# Altium PCB ZX_UNO_Aplus2.PcbDoc
Units mil, origin at the board's own origin, x right, y up, seen from the top; angles counter-clockwise.
Board outline 3395.53 x 2214.53 mil, 2 copper layers (Top Layer, Bottom Layer); 91 components, 129 nets, 509 pads, 138 vias.
Unrouted connection lines stored in the file: 3.
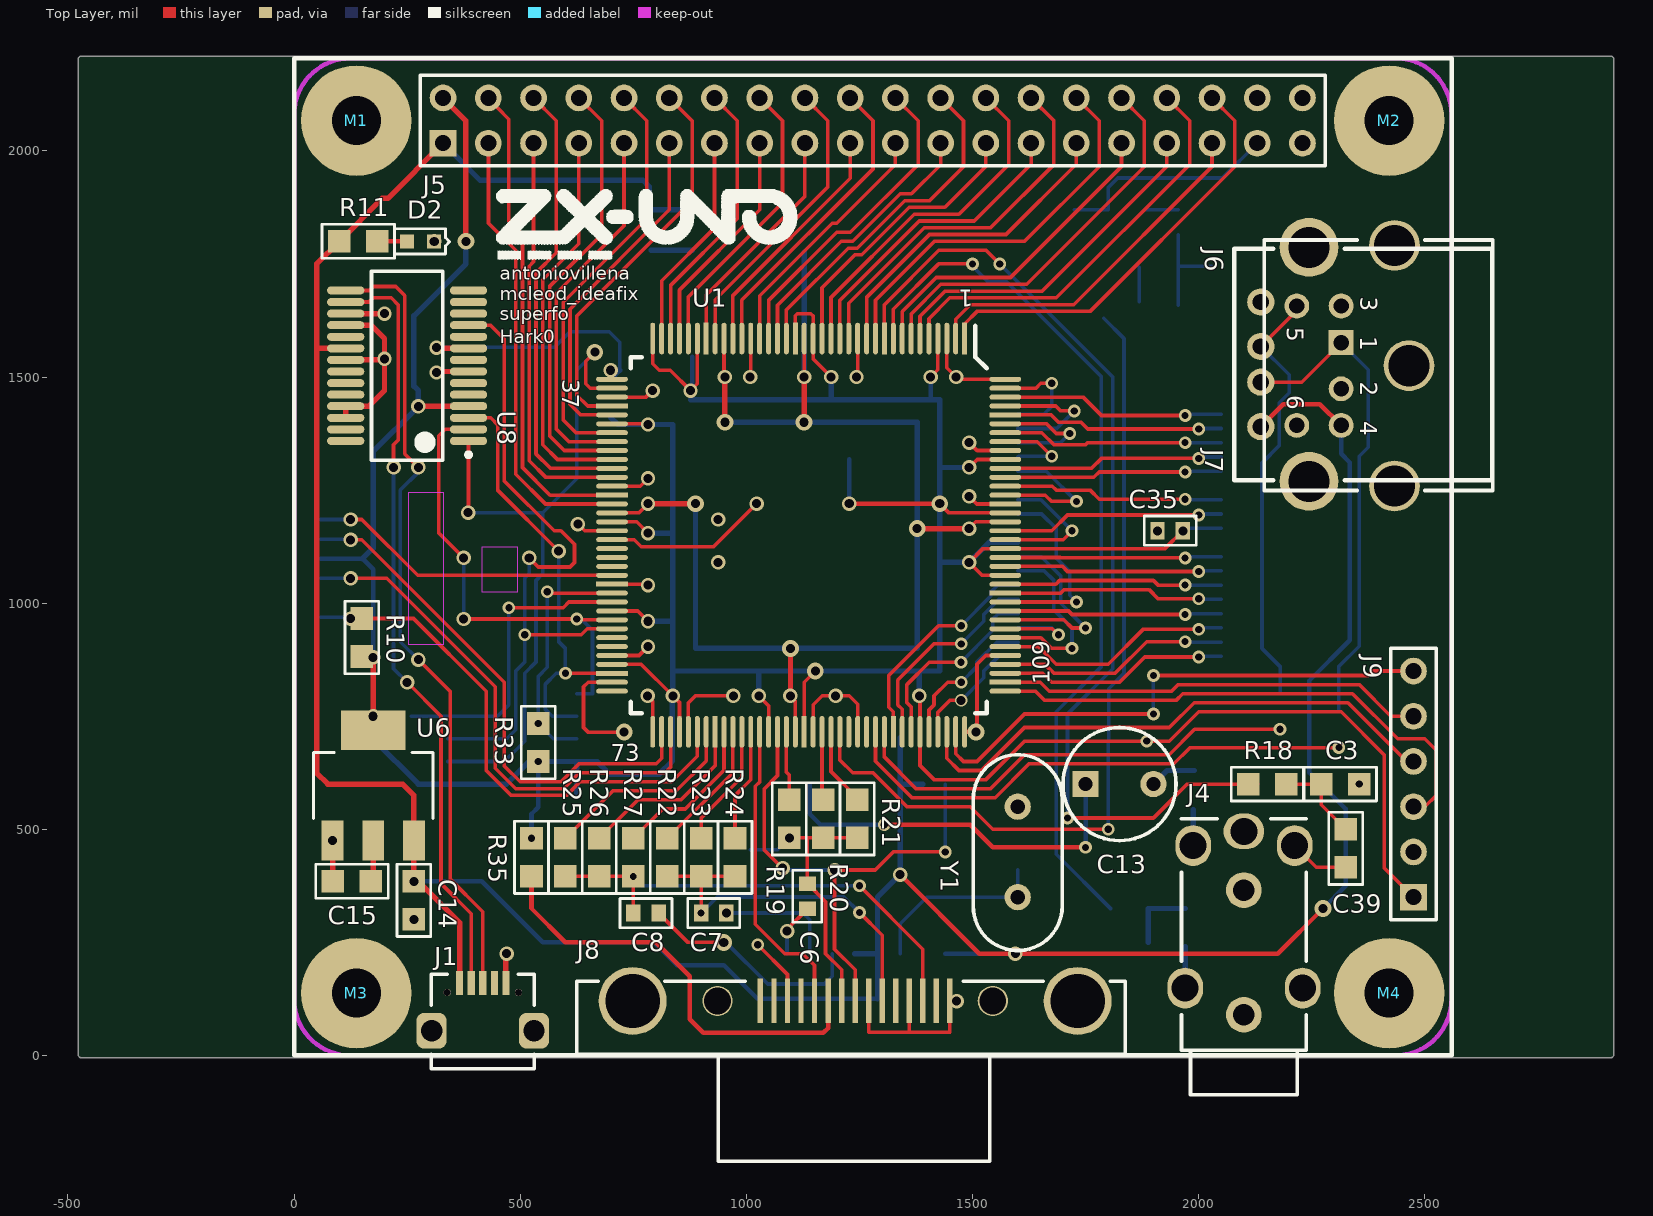
[diagram p0: Top Layer view]
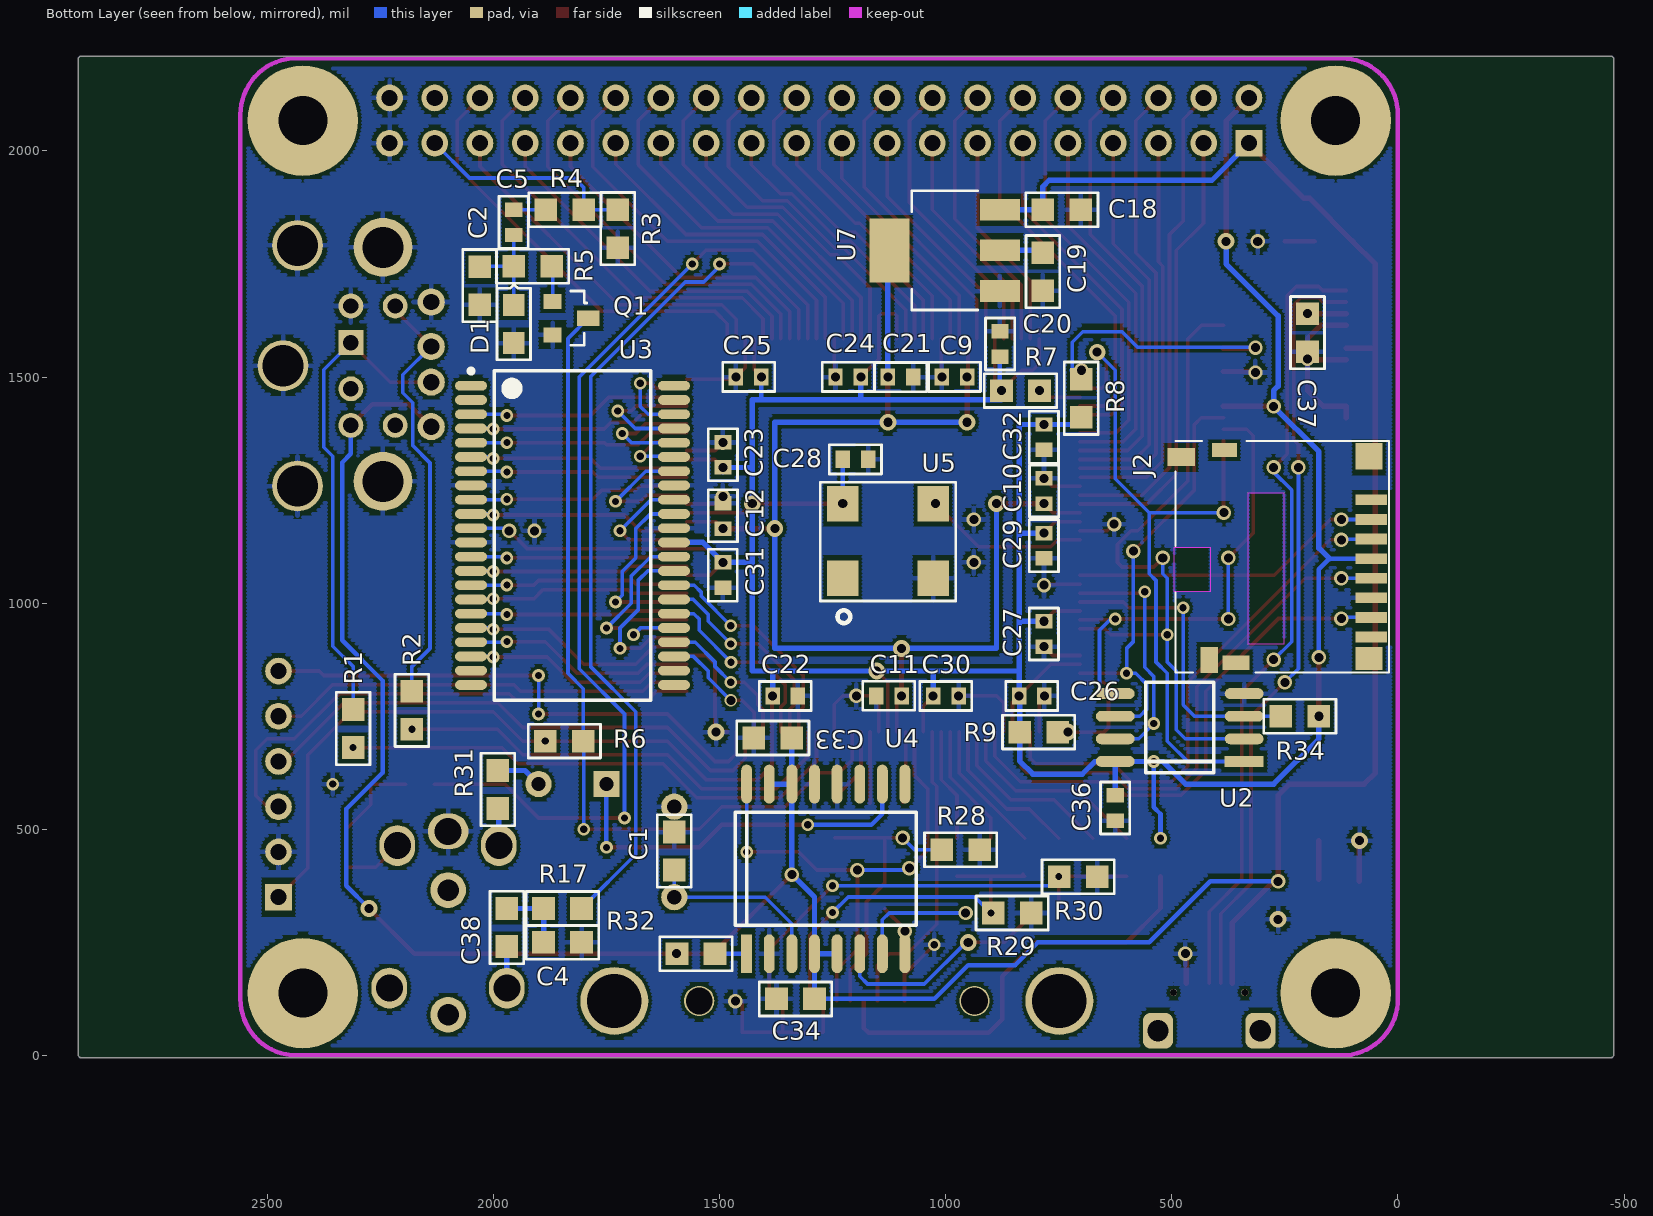
[diagram p1: Bottom Layer view, seen from below]

## Layer stack, top to bottom
Top Solder: solder mask 0.4, Solder Resist, Dk 3.5
Top Layer: signal copper 1.4
Dielectric1: core 12.6, FR-4, Dk 4.8
Bottom Layer: signal copper 1.4
Bottom Solder: solder mask 0.4, Solder Resist, Dk 3.5

## Board outline
-477.44,0 -472.44,-5 2913.09,-5 2918.09,0 2918.09,2204.53 2913.09,2209.53 -472.44,2209.53 -477.44,2204.53

## Design rules (kind name [scope] priority, off if disabled: settings)
Clearance [All] p1: gap=7
HoleSize [All] p1: absolutevalues=TRUE maxlimit=200 minlimit=1 maxpercent=80.000 minpercent=20.000
MinimumSolderMaskSliver [All] p1: minsoldermaskwidth=8
PlaneConnect [All] p1: planeconnectstyle=Relief reliefexpansion=25 reliefentries=4 reliefconductorwidth=12 reliefairgap=10
PolygonConnect [All] p1: connectstyle=Relief reliefconductorwidth=10 reliefentries=4 polygonreliefangle="90 Angle" airgapwidth=10
RoutingLayers RoutingLayers_1 [All] p1: top layer_v5=TRUE bottom layer_v5=TRUE
RoutingLayers [All] p2: top layer_v5=TRUE bottom layer_v5=TRUE
RoutingVias [All] p1: holewidth=20 width=37 viastyle="Through Hole" minholewidth=16 minwidth=28 maxholewidth=28 maxwidth=50
SilkToSilkClearance [All] p1: silktosilkclearance=5
SilkToSolderMaskClearance SilkscreenOverComponentPads [IsPad] p1: minsilkscreentomaskgap=5 clearancetoexposedcopper=TRUE
SolderMaskExpansion [All] p1: expansion=0
Width Net_Width_1 [InNet('1.2V') Or InNet('2.5V') Or InNet('3.3V') Or InNet('5V')] p1: maxlimit=12 minlimit=8 preferedwidth=10
Width [All] p2: maxlimit=12 minlimit=8 preferedwidth=10
24 further rules are at their usual default settings.

## Components (designator, comment, footprint, x,y, rotation, side; value= is the part's Value field where it differs from the comment)
C1 "10pF" SM/C_0805#1 1600,410 r90 bottom
C2 "10nF" SM/C_0805#2 2030,1660 r270 bottom
C3 "10nF" SM/C_0805#2 2355,600 r0 top
C4 "10nF" SM/C_0805#2 1805,250 r180 bottom
C5 "100nF" SM/C_0603 1955,1870 r270 bottom
C6 "100nF" SM/C_0603 1135,380 r270 top
C7 "100nF" SM/C_0603 900,315 r0 top
C8 "100nF" SM/C_0603 750,315 r0 top
C9 "100nF" SM/C_0603 952.56,1500 r0 bottom
C10 "100nF" SM/C_0603 782.56,1220 r90 bottom
C11 "100nF" SM/C_0603 1097.56,795 r0 bottom
C12 "100nF" SM/C_0603 1492.56,1165 r90 bottom
C13 "220uF" CYL/D.250/LS.150/.031 1750,600 r0 top
C14 "10uF" SM/C_0805#1 265,385 r270 top
C15 "10uF" SM/C_0805#1 170,385 r180 top
C18 "10uF" SM/C_0805#2 785,1870 r0 bottom
C19 "10uF" SM/C_0805#2 785,1775 r90 bottom
C20 "100nF" SM/C_0603 880,1545 r90 bottom
C21 "100nF" SM/C_0603 1127.56,1500 r180 bottom
C22 "100nF" SM/C_0603 1382.56,795 r180 bottom
C23 "100nF" SM/C_0603 1492.56,1300 r90 bottom
C24 "100nF" SM/C_0603 1187.56,1500 r0 bottom
C25 "100nF" SM/C_0603 1407.56,1500 r0 bottom
C26 "100nF" SM/C_0603 837.56,795 r180 bottom
C27 "100nF" SM/C_0603 782.56,960 r270 bottom
C28 "100nF" SM/C_0603 1227.56,1318 r180 bottom
C29 "100nF" SM/C_0603 782.56,1155 r270 bottom
C30 "100nF" SM/C_0603 1027.56,795 r180 bottom
C31 "100nF" SM/C_0603 1492.56,1090 r270 bottom
C32 "100nF" SM/C_0603 782.56,1395 r270 bottom
C33 "10uF" SM/C_0805#1 1340,702 r0 bottom
C34 "10uF" SM/C_0805#1 1290,125 r0 bottom
C35 "100nF" SM/C_0603 1965,1160 r180 top
C36 "100nF" SM/C_0603 625,575 r270 bottom
C37 "Cap" SM/C_0805#1 200,1640 r270 bottom
C38 "10uF" SM/C_0805#1 1970,325 r270 bottom
C39 "10uF" SM/C_0805#1 2325,500 r270 top
D1 "1N4148" SM/D_0805_21 1955,1575 r270 bottom
D2 "LED0" SM/LED_0603_21 250,1800 r180 top
J1 "microUSB" "MICRO USB" 417.32,160 r0 top
J2 "MicroSD" "SD HR1941CT-ND" 59.06,1102.36 r90 bottom
J4 "Phonejack4" "AUDIO JACK PJ-322" 2100,90 r90 top locked
J5 "Header 20X2" HDR2X20 329.53,2016.93 r0 top locked
J6 "PS2" DINC/MIN_TM/6 2650,1525 r270 top (schematic designator J11)
J7 "USB-A" "USB A" 2244.1,1528.03 r90 top
J8 "DSUBHD 15-P" DSUB/RP/SM/15 1450,95 r180 top locked
J9 "Header 6" HDR1X6 2475,350 r90 top
M1 "M2.5" M2.5#1 -722.44,2050 r0 top
M2 "M2.5" M2.5#2 3177.56,2070 r0 top
M3 "M2.5" M2.5#3 -792.44,-110 r0 top
M4 "M2.5" M2.5#4 3092.56,-175 r0 top
Q1 "BC846" SM/SOT23_231 1790,1630 r90 bottom
R1 "Res1" SM/R_0805#1 2310,765 r270 bottom
R2 "Res1" SM/R_0805#1 2180,805 r270 bottom
R3 "Res1" SM/R_0805#2 1725,1870 r90 bottom
R4 "Res1" SM/R_0805#2 1800,1870 r180 bottom
R5 "Res1" SM/R_0805#2 1955,1745 r0 bottom
R6 "Res1" SM/R_0805#1 1885,695 r180 bottom
R7 "Res1" SM/R_0805#1 792.56,1470 r0 bottom
R8 "Res1" SM/R_0805#1 700,1495 r270 bottom
R9 "Res1" SM/R_0805#1 752.56,715 r0 bottom
R10 "Res1" SM/R_0805#1 150,966 r270 top
R11 "Res1" SM/R_0805#1 100,1800 r0 top
R17 "Res1" SM/R_0805#1 1805,325 r0 bottom
R18 "Res1" SM/R_0805#1 2110,600 r0 top
R19 "Res1" SM/R_0805#1 1095,565 r270 top
R20 "Res1" SM/R_0805#1 1169.76,565.24 r270 top
R21 "Res1" SM/R_0805#1 1245,565 r270 top
R22 "Res1" SM/R_0805#1 825,480 r270 top
R23 "Res1" SM/R_0805#1 900,480 r270 top
R24 "Res1" SM/R_0805#1 975,480 r270 top
R25 "Res1" SM/R_0805#1 600,480 r270 top
R26 "Res1" SM/R_0805#1 675,480 r270 top
R27 "Res1" SM/R_0805#1 750,480 r270 top
R28 "Res1" SM/R_0805#1 925,455 r0 bottom
R29 "Res1" SM/R_0805#1 811,315 r0 bottom
R30 "Res1" SM/R_0805#1 665,395 r0 bottom
R31 "Res1" SM/R_0805#2 1990,630 r90 bottom
R32 "Res1" SM/R_0805#1 1510,225 r0 bottom
R33 "Res1" SM/R_0805#1 540,650 r90 top
R34 "Res1" SM/R_0805#1 175,750 r0 bottom
R35 "Res1" SM/R_0805#1 525,480 r270 top
U1 "XC6SLX9/TFP144" QUAD.50M/144/WG22.60 1482.56,1585 r180 top locked
U2 "W25X40BV/W25Q80BV" SOJ.050/8/WB.300/L.200 340,650 r90 bottom
U3 "IS61WV20488BLL-10TI" SOP80P1176-44M 1825,1150 r180 bottom
U4 "AD724" SOJ.050/16/WB.400/L.400 1440,225 r180 bottom locked
U5 "OSC 50MHz" SM/OSC 1227.56,1055 r0 bottom
U6 "ZLDO1117G33TA" SM/SOT223 85,475 r0 top
U7 "ZLDO1117G12TA" SM/SOT223 880,1690 r90 bottom
U8 "FT245RL" SOP65P780-28N 250,1525 r180 top
Y1 "4.43MHz" XTAL 1600,350 r90 top

## Footprints (in the part's own frame and the unit in brackets; to place one, negate y for a bottom-side part, rotate by r counter-clockwise, add the part's x,y. Pads: shape width x height; smd on the part's side, far side on the other; paste and mask are expansions set on the pad)
"AUDIO JACK PJ-322" [mm]
  oval 2x2.286 hole 1.524: 1(10.3,0)
  oval 2.286x2 hole 1.524: 2(1.5,3.3) 2(1.5,-3.3) 3(9.5,-2.85) 4(9.5,2.85)
  round 2 hole 1.2 unplated: 6(0,0) 7(7,0)
  silkscreen extent -4.5,-3.5 11,3.5
CYL/D.250/LS.150/.031 [mil]
  rect 58x58 / inner round 60 / far side rect 58x58 hole 31: 1(0,0)
  round 58 / inner round 60 / far side round 58 hole 31: 2(150,0)
  silkscreen extent -50,-125 200,125
DINC/MIN_TM/6 [mil]
  rect 55x55 hole 34: 1(-51,-335)
  round 55 hole 34: 2(51,-335) 3(-132,-335) 4(132,-335) 5(-132,-433) 6(132,-433)
  round 112 hole 91: M1(-266,-217) M2(0,-185) M3(266,-217)
  silkscreen extent -278,-505 276,0
DSUB/RP/SM/15 [mm]
  rect 0.3x2.5 smd: 1(1.52,-0.65) 2(3.8,-0.65) 3(6.08,-0.65) 4(8.36,-0.65) 5(10.64,-0.65) 6(0,-0.65) 7(2.28,-0.65) 8(4.56,-0.65) 9(6.84,-0.65) 10(9.12,-0.65) 11(0.76,-0.65) 12(3.04,-0.65) 13(5.32,-0.65) 14(7.6,-0.65) 15(9.88,-0.65)
  round 1.7 hole 1.5: 16(-2.41,-0.65) 17(13.05,-0.65)
  round 3.81 hole 3.048: Hole49(-7.175,-0.65) Hole50(17.815,-0.65)
  silkscreen extent -9.86,-1.75 20.95,8.35
HDR1X6 [mm] "Connector; Header; 6 Position"
  rect 1.5x1.5 hole 0.9: 1(0,0)
  round 1.5 hole 0.9: 2(2.54,0) 3(5.08,0) 4(7.62,0) 5(10.16,0) 6(12.7,0)
  silkscreen extent -1.27,-1.27 13.97,1.27
HDR2X20 [mm] "Connector; Header; 20x2 Position"
  rect 1.5x1.5 hole 0.9: 1(0,0)
  round 1.5 hole 0.9: 2(0,2.54) 3(2.54,0) 4(2.54,2.54) 5(5.08,0) 6(5.08,2.54) 7(7.62,0) 8(7.62,2.54) 9(10.16,0) 10(10.16,2.54) 11(12.7,0) 12(12.7,2.54) 13(15.24,0) 14(15.24,2.54) 15(17.78,0) 16(17.78,2.54) 17(20.32,0) 18(20.32,2.54) 19(22.86,0) 20(22.86,2.54) 21(25.4,0) 22(25.4,2.54) 23(27.94,0) 24(27.94,2.54) 25(30.48,0) 26(30.48,2.54) 27(33.02,0) 28(33.02,2.54) 29(35.56,0) 30(35.56,2.54) 31(38.1,0) 32(38.1,2.54) 33(40.64,0) 34(40.64,2.54) 35(43.18,0) 36(43.18,2.54) 37(45.72,0) 38(45.72,2.54) 39(48.26,0) 40(48.26,2.54)
  silkscreen extent -1.27,-1.27 49.53,3.81
M2.5#1 [mm]
  round 6.2 hole 2.75: ""(21.85,0.43)
M2.5#2 [mm]
  round 6.2 hole 2.75: ""(-19.21,-0.078)
M2.5#3 [mm]
  round 6.2 hole 2.75: ""(23.628,6.294)
M2.5#4 [mm]
  round 6.2 hole 2.75: ""(-17.051,7.945)
"MICRO USB" [mm]
  rect 0.4x1.35 smd: 1(-1.3,0) 2(-0.65,0) 3(0,0) 4(0.65,0) 5(1.3,0)
  round 0.4 hole 0.4 unplated: 11(2,-0.525) M(-2,-0.525)
  rrect50% 1.7x2 hole 1.2: M(-2.875,-2.675) M(2.875,-2.675)
  silkscreen extent -2.9,-4.8 2.9,0.5
QUAD.50M/144/WG22.60 [mil]
  rect 11x70 smd: 1(0,0) 10(177.3,0) 20(374.3,0) 30(571.3,0) 80(551.6,869.5) 90(354.6,869.5) 100(157.6,869.5)
  oval 11x70 smd: 2(19.7,0) 3(39.4,0) 4(59.1,0) 5(78.8,0) 6(98.5,0) 7(118.2,0) 8(137.9,0) 9(157.6,0) 11(197,0) 12(216.7,0) 13(236.4,0) 14(256.1,0) 15(275.8,0) 16(295.5,0) 17(315.2,0) 18(334.9,0) 19(354.6,0) 21(394,0) 22(413.7,0) 23(433.4,0) 24(453.1,0) 25(472.8,0) 26(492.5,0) 27(512.2,0) 28(531.9,0) 29(551.6,0) 31(591,0) 32(610.7,0) 33(630.4,0) 34(650.1,0) 35(669.8,0) 36(689.5,0) 73(689.5,869.5) 74(669.8,869.5) 75(650.1,869.5) 76(630.4,869.5) 77(610.7,869.5) 78(591,869.5) 79(571.3,869.5) 81(531.9,869.5) 82(512.2,869.5) 83(492.5,869.5) 84(472.8,869.5) 85(453.1,869.5) 86(433.4,869.5) 87(413.7,869.5) 88(394,869.5) 89(374.3,869.5) 91(334.9,869.5) 92(315.2,869.5) 93(295.5,869.5) 94(275.8,869.5) 95(256.1,869.5) 96(236.4,869.5) 97(216.7,869.5) 98(197,869.5) 99(177.3,869.5) 101(137.9,869.5) 102(118.2,869.5) 103(98.5,869.5) 104(78.8,869.5) 105(59.1,869.5) 106(39.4,869.5) 107(19.7,869.5) 108(0,869.5)
  oval 70x11 smd: 37(779.5,90) 38(779.5,109.7) 39(779.5,129.4) 41(779.5,168.8) 42(779.5,188.5) 43(779.5,208.2) 44(779.5,227.9) 45(779.5,247.6) 46(779.5,267.3) 47(779.5,287) 48(779.5,306.7) 49(779.5,326.4) 51(779.5,365.8) 52(779.5,385.5) 53(779.5,405.2) 54(779.5,424.9) 55(779.5,444.6) 56(779.5,464.3) 57(779.5,484) 58(779.5,503.7) 59(779.5,523.4) 61(779.5,562.8) 62(779.5,582.5) 63(779.5,602.2) 64(779.5,621.9) 65(779.5,641.6) 66(779.5,661.3) 67(779.5,681) 68(779.5,700.7) 69(779.5,720.4) 71(779.5,759.8) 72(779.5,779.5) 109(-90,779.5) 111(-90,740.1) 112(-90,720.4) 113(-90,700.7) 114(-90,681) 115(-90,661.3) 116(-90,641.6) 117(-90,621.9) 118(-90,602.2) 119(-90,582.5) 121(-90,543.1) 122(-90,523.4) 123(-90,503.7) 124(-90,484) 125(-90,464.3) 126(-90,444.6) 127(-90,424.9) 128(-90,405.2) 129(-90,385.5) 131(-90,346.1) 132(-90,326.4) 133(-90,306.7) 134(-90,287) 135(-90,267.3) 136(-90,247.6) 137(-90,227.9) 138(-90,208.2) 139(-90,188.5) 141(-90,149.1) 142(-90,129.4) 143(-90,109.7) 144(-90,90)
  rect 70x11 smd: 40(779.5,149.1) 50(779.5,346.1) 60(779.5,543.1) 70(779.5,740.1) 110(-90,759.8) 120(-90,562.8) 130(-90,365.8) 140(-90,168.8)
  silkscreen extent -49,-28 738,829
"SD HR1941CT-ND" [mm] "Connector; Header; 8 Position"
  rect 0.6x1.75 smd: 1(3.2,0) 2(2.1,0) 3(1,0) 4(-0.1,0) 5(-1.2,0) 6(-2.3,0) 7(-3.4,0) 8(-4.5,0)
  rect 1x1.55 smd: 9(5.6,10.675)
  rect 1.45x1 smd: 10(-5.8,9.1)
  rect 1.3x1.5 smd: P1(-5.7,0.125)
  rect 1.5x1.5 smd: P2(5.65,0.125)
  rect 0.8x1.5 smd: P3(-5.95,7.6)
  rect 0.8x1.4 smd: P4(6,8.25)
  Keep-Out Layer pour cut-out: -1.95,11.05 0.55,11.05 0.55,9.05 -1.95,9.05
  Keep-Out Layer pour cut-out: -4.9,6.9 3.6,6.9 3.6,4.9 -4.9,4.9
  silkscreen extent -6.5,-1 6.5,11
SM/C_0603 [mil]
  rect 32x38 smd: 1(0,0) 2(56,0)
  silkscreen extent -30,-33 86,32
SM/C_0805#1 [mil]
  rect 50x50 smd: 1(0,0) 2(84,0)
  silkscreen extent -38,-38 122,38
SM/C_0805#2 [mil]
  rect 50x50 smd: 1(0,0) 2(-84,0)
  silkscreen extent -122,-38 38,38
SM/D_0805_21 [mil]
  rect 48x48 smd: 1(0,0) 2(-84,0)
  silkscreen extent -130,-37 37,37
SM/LED_0603_21 [mil]
  rect 31x31 smd: 1(0,0) 2(-59,0)
  silkscreen extent -94,-28 28,28
SM/OSC [mil]
  rect 70x78 smd: 1(0,0) 2(-200,0) 3(-200,-165) 4(0,-165)
  silkscreen extent -250,-212 50,50
SM/R_0805#1 [mil]
  rect 50x50 smd: 1(0,0) 2(84,0)
  silkscreen extent -38,-38 122,38
SM/R_0805#2 [mil]
  rect 50x50 smd: 1(0,0) 2(-84,0)
  silkscreen extent -122,-38 38,38
SM/SOT23_231 [mil]
  rect 34x50 smd: 1(0,0)
  rect 34x40 smd: 2(37,79) 3(-37,79)
  silkscreen extent -60,3 60,39
SM/SOT223 [mil]
  rect 48x88 smd: 1(0,0) 2(90,0) 3(180,0)
  rect 142x88 smd: 4(90,244)
  silkscreen extent -42,49 222,195
SOJ.050/8/WB.300/L.200 [mil]
  rect 24x86 smd: 1(0,0)
  oval 24x86 smd: 2(50,0) 3(100,0) 4(150,0) 5(150,285) 6(100,285) 7(50,285) 8(0,285)
  silkscreen extent -25,67 175,218
SOJ.050/16/WB.400/L.400 [mil]
  rect 24x86 smd: 1(0,0)
  oval 24x86 smd: 2(50,0) 3(100,0) 4(150,0) 5(200,0) 6(250,0) 7(300,0) 8(350,0) 9(350,375) 10(300,375) 11(250,375) 12(200,375) 13(150,375) 14(100,375) 15(50,375) 16(0,375)
  silkscreen extent -25,62 375,312
SOP65P780-28N [mm] "SOP, 28-Leads, Body 10.2x5.3mm, Pitch 0.65mm, IPC Medium Density"
  oval 2.1x0.45 smd: 1(-3.45,4.225) 2(-3.45,3.575) 3(-3.45,2.925) 4(-3.45,2.275) 5(-3.45,1.625) 6(-3.45,0.975) 7(-3.45,0.325) 8(-3.45,-0.325) 9(-3.45,-0.975) 10(-3.45,-1.625) 11(-3.45,-2.275) 12(-3.45,-2.925) 13(-3.45,-3.575) 14(-3.45,-4.225) 15(3.45,-4.225) 16(3.45,-3.575) 17(3.45,-2.925) 18(3.45,-2.275) 19(3.45,-1.625) 20(3.45,-0.975) 21(3.45,-0.325) 22(3.45,0.325) 23(3.45,0.975) 24(3.45,1.625) 25(3.45,2.275) 26(3.45,2.925) 27(3.45,3.575) 28(3.45,4.225)
  silkscreen extent -3.57,-5.3 2,5.3, body extent -2.7,-5.3 2.7,5.3, height 2
SOP80P1176-44M [mm] "SOP, 44-Leads, Body 18.4x10.16mm, Pitch 0.8mm, IPC Low Density"
  oval 1.8x0.55 smd: 1(-5.7,8.4) 2(-5.7,7.6) 3(-5.7,6.8) 4(-5.7,6) 5(-5.7,5.2) 6(-5.7,4.4) 7(-5.7,3.6) 8(-5.7,2.8) 9(-5.7,2) 10(-5.7,1.2) 11(-5.7,0.4) 12(-5.7,-0.4) 13(-5.7,-1.2) 14(-5.7,-2) 15(-5.7,-2.8) 16(-5.7,-3.6) 17(-5.7,-4.4) 18(-5.7,-5.2) 19(-5.7,-6) 20(-5.7,-6.8) 21(-5.7,-7.6) 22(-5.7,-8.4) 23(5.7,-8.4) 24(5.7,-7.6) 25(5.7,-6.8) 26(5.7,-6) 27(5.7,-5.2) 28(5.7,-4.4) 29(5.7,-3.6) 30(5.7,-2.8) 31(5.7,-2) 32(5.7,-1.2) 33(5.7,-0.4) 34(5.7,0.4) 35(5.7,1.2) 36(5.7,2) 37(5.7,2.8) 38(5.7,3.6) 39(5.7,4.4) 40(5.7,5.2) 41(5.7,6) 42(5.7,6.8) 43(5.7,7.6) 44(5.7,8.4)
  silkscreen extent -5.82,-9.25 4.4,9.35, body extent -5.13,-9.26 5.13,9.26, height 1.2
"USB A" [mm]
  round 1.524 hole 0.92: 1(-3.5,2.71) 2(-1,2.71) 3(1,2.71) 4(3.5,2.71)
  round 3.3 hole 2.3: 5(-6.57,0) 6(6.57,0)
  silkscreen extent -6.5,-10.3 6.5,4.2
XTAL [mil]
  round 58 hole 32: 1(0,0) 2(200,0)
  silkscreen extent -118,-98 315,98

## Part data
C1 C2 C3 C4 C5 C6 C7 C8 C9 C10 C11 C12 C14 C15 C18 C19 C20 C21 C22 C23 C24 C25 C26 C27 C28 C29 C30 C31 C32 C33 C34 C35 C36 C38 C39: library part "CAP NP"
C13: library part CAP
C37: "Capacitor"
D1: library part DIODE
D2: "Typical INFRARED GaAs LED"
J1: library part "Header 5", "Header, 5-Pin"
J2: library part "Header 8", "Header, 8-Pin"
J4: "Jack Socket, 3.5mm, Thru-Hole, Right Angle, 4-Conductor"
J5: "Header, 20-Pin, Dual row"
J6: library part "M-DIN 8"
J7: library part "Header 6", "Header, 6-Pin"
J8: "Receptacle Assembly, 15-Pin, Sim Line Connector"
J9: "Header, 6-Pin"
Q1: library part BC547
R1 R2 R3 R4 R5 R6 R7 R8 R9 R10 R11 R17 R18 R19 R20 R21 R22 R23 R24 R25 R26 R27 R28 R29 R30 R31 R32 R33 R34 R35: "Resistor"
U2: library part FLASH-25XX
U5: library part OSC
U6 U7: library part REGULATOR-1
U8: "USB/Parallel FIFO Bi-Directional Data Transfer Chip, LQFP-32, Pb-Free"
Y1: library part XTAL, "Crystal Oscillator"

## Via types
v1: diameter 32, hole 20, Top Layer to Bottom Layer, 67 vias
v2: diameter 28, hole 16, Top Layer to Bottom Layer, 53 vias
v3: diameter 37, hole 20, Top Layer to Bottom Layer, 15 vias
v4: diameter 30, hole 15, Top Layer to Bottom Layer, 2 vias
v5: diameter 28, hole 20, Top Layer to Bottom Layer, 1 vias

## Nets (pads, with @x,y where several pads share a name; then routed paths per layer and width w, separated by ;. In a path a pad name is that pad's centre, name@x,y a point inside that pad or via, vN(x,y) a via of type N, cw(c..) or ccw(c..) an arc to the next point about the centre after c; other vN are vias at no path point)
1.2V: C9.1 C10.1 C11.1 C12.1 C19.1 C21.1 U1.19 U1.28 U1.52 U1.89 U1.128 U7.2 U7.4 | length 3052.2
  Top Layer w8: U1.52 762.06,1199.5 v1(782.56,1220) ; v1@950.66,1501.9 U1.28 ; v1(1097.56,795) 1108.26,784.3 U1.89 ; v1@1127.96,1500.4 U1.19 ; v1(1492.56,1165) 1507.36,1179.8 U1.128
  Top Layer w12: v1(782.56,1220) v3(887.56,1220) ; v3(952.56,1400) v1(952.56,1500) ; v1(1097.56,795) v3(1097.56,900) ; v3(1127.56,1400) v1(1127.56,1500) ; v3(1377.56,1165) v1(1492.56,1165)
  Bottom Layer w12: C19.1@790,1780 U7.2 ; v3(887.56,1220) 887.56,900 v3(1097.56,900) 1377.56,900 v3(1377.56,1165) 1377.56,1400 v3(1127.56,1400) v3(952.56,1400) ; v1(1127.56,1500) U7.4@1127.56,1776.44
3.3V: C15.1 C20.1 C22.1 C23.1 C24.1 C25.1 C26.1 C27.1 C28.1 C29.1 C30.1 C31.1 C32.1 C35.1 C36.1 J2.4 J5.2 J9.1 R6.1 R7.2 R8.2 R9.2 R10.2 R33.1 R34.1 R35.1 U1.4 U1.18 U1.20 U1.31 U1.36 U1.42 U1.53 U1.63 U1.69 U1.76 U1.86 U1.90 U1.103 U1.122 U1.125 U1.129 U1.135 U2.8 U3.11 U3.33 U5.4 U6.2 U6.4 U8.4 | length 10353.5
  Top Layer w8: U1.69 767.96,864.6 v1(837.56,795) 852.16,780.4 U1.76 ; U1.63 759.76,982.8 v1(782.56,960) ; U1.53 757.76,1179.8 v1(782.56,1155) ; U1.42 v1@781.06,1396.5 ; U1.36 793.06,1529.5 807.56,1515 831.56,1515 v1(876.56,1470) 891.56,1485 U1.31 ; U1.36@793.06,1596.94 U1.36@793.06,1606.94 ; v1(1027.56,795) 1049.16,773.4 U1.86 ; U1.20 1108.26,1635.7 1112.56,1640 1142.56,1640 1147.66,1634.9 U1.18 1147.66,1539.9 v1(1187.56,1500) ; U1.90 1127.96,825.4 v3(1152.56,850) ; v1(1382.56,795) 1384.06,793.5 U1.103 1384.06,640.94 1415,610 1530,610 1615,695 1935,695 2000,760 2315,760 2410,665 2410,415 J9.1 ; v1(1407.56,1500) 1423.46,1515.9 U1.4 ; v3(1427.56,1220) 1448.06,1199.5 U1.129 ; v1(1492.56,1300) 1510.26,1317.7 U1.135 ; U1.122 1520.96,1061.6 v1(1492.56,1090) 1523.26,1120.7 U1.125 1925.7,1120.7 v1(1965,1160)
  Top Layer w10: v1(1227.56,1220) v3(1427.56,1220)
  Top Layer w12: C15.1@175,390 U6.2 ; v1(175,750) v1(175,880) ; v1@275,1435.43 U8.4 ; J5.2 380,2066.46 v3(380,1800)
  Bottom Layer w8: v1(1965,1160) 1970.75,1165.75 U3.11
  Bottom Layer w10: J2.4 151.57,1098.43 175,1075 v1(175,880) ; v2(525,480) 525,534 540,549 v2(540,650) ; R7.2@880,1473.44 C20.1 ; v1(1227.56,1220) C28.1 ; 1407.56,1450 v1(1407.56,1500)
  Bottom Layer w12: 151.57,1098.43 175,1121.85 175,1335 v1(275,1435) 275,1470 265,1480 265,1635 380,1750 v3(380,1800) ; v1(175,750) 175,700 275,600 469.5,600 519.5,650 v2(540,650) U2.8 ; C36.1 U2.8 ; R8.2 716,1395 v1(782.56,1395) 837.56,1395 837.56,1155 ; v1(782.56,960) 837.56,960 ; v1(782.56,1155) 837.56,1155 ; C26.1@836.56,794 R9.2 836.56,651.56 807,622 698,622 670,650 U2.8 ; v1(837.56,795) 837.56,850 ; R7.2@877.56,1450 1407.56,1450 1427.56,1450 1427.56,1300 ; v1(1027.56,795) 1027.56,850 ; 1187.56,1451 v1(1187.56,1500) ; v1(1382.56,795) 1382.56,850 ; C23.1@1497.56,1300 1497.56,1295 1492.56,1290 1482.56,1300 1427.56,1300 ; U3.33 1536.81,1134.25 v1(1492.56,1090) 1427.56,1090 ; 837.56,850 1027.56,850 ; 837.56,850 837.56,960 ; 837.56,960 837.56,1155 ; 1027.56,850 v3(1152.56,850) 1382.56,850 ; 1382.56,850 1427.56,850 1427.56,1090 ; 1427.56,1090 v3(1427.56,1220) 1427.56,1300
  other v2: 1885,695
5V: C14.1 C18.1 C33.1 C34.1 J1.1 J5.1 J6.4 J7.1 R11.1 R32.2 U4.4 U4.5 U4.14 U4.15 U6.3 U7.3 U8.20 | length 7180.9
  Top Layer w10: v1(1340,400) 1515,225 v1(1595,225) 2175,225 v3(2275,325) ; J7.1 2187.17,1440 2268,1440 J6.4
  Top Layer w12: 51.61,1563.39 U8.20 ; J5.1 207.6,1895 195,1895 R11.1 50,1750 50,625 75,600 240,600 265,575 U6.3 v1(265,385) 275,385 366.14,293.86 J1.1
  Bottom Layer w10: v1(265,385) 415,385 550,250 796,250 846,200 950,200 1025,125 C34.1 ; v3(2275,325) 2325,375 2325,545 2245,625 2245,829 2334,918 2334,1311 2315,1330 J6.4
  Bottom Layer w12: J5.1 411.46,1935 771,1935 785,1921 C18.1 U7.3 ; U4.5 U4.4 ; C34.1 U4.4 ; C33.1 U4.14 ; U4.15 U4.14 ; U4.4 1290,350 v1(1340,400) U4.14
B: C6.1 J8.3 R19.2 R20.2 R21.2 R28.2 | length 648.5
  Top Layer w8: v1(1095,481) 1135,481 ; 1175,335 1175,325 ; J8.3 1210.63,189.37 1175,225 1175,325 ; R21.2 1135,481 ; 1135,481 C6.1 1175,340 1175,325
  Bottom Layer w8: R28.2 1069,455 v1(1095,481)
B0: R19.1 U1.88 | length 158.2
  Top Layer w8: U1.88 1088.56,626.44 1095,620 R19.1@1095,560
B1: R20.1 U1.92 | length 157.7
  Top Layer w8: R20.1@1167.36,557.84 U1.92
B2: R21.1 U1.93 | length 179.5
  Top Layer w8: U1.93 1187.06,627.94 1245,570 R21.1@1245,560
CLK: U1.55 U5.3 | length 365.2
  Top Layer w8: U1.55 752.16,1140.4 767.56,1125 927.56,1125 v1(1022.56,1220)
CSYNC: J8.13 U1.87 U4.16 | length 1166.5
  Top Layer w8: U1.87 1068.86,618.86 1040,590 1040,454 v1(1080,414) ; J8.13 1240.55,189.45 1195,235 v1(1195,410) 1285,410 1325,450 v2(1440,450)
  Bottom Layer w8: v1(1080,414) 1084,410 v1(1195,410) ; v2(1440,450) U4.16
D+: J1.3 U8.15 | length 1767.2
  Top Layer w8: U8.15 166.34,1691.34 175,1700 225,1700 245,1680 245,1330 v1(275,1300) ; v1(275,875) 345,805 345,390 417.32,317.68 J1.3
  Bottom Layer w8: v1(275,875) 235,915 235,1250 275,1290 v1(275,1300)
D-: J1.2 U8.16 | length 1701.1
  Top Layer w8: U8.16 165.75,1665.75 175,1675 215,1675 230,1660 230,1360 220,1350 v1(220,1300) ; v1(250,825) 325,750 325,380 391.73,313.27 J1.2
  Bottom Layer w8: v1(220,1300) 220,855 v1(250,825)
EAR: Q1.1 R6.2 U1.94 | length 1882.1
  Top Layer w8: U1.94 1206.76,653.24 1235,625 1280,625 1355,550 1495,550 1545,500 v2(1800,500)
  Bottom Layer w8: Q1.1 1835,1585 1835,845 1801,811 R6.2 1800,694 v2(1800,500)
EXT1: J5.3 U1.51 | length 997.1
  Top Layer w8: J5.3@430,2016.93 430,1840 490,1780 490,1285 555.8,1219.2 U1.51
EXT2: J5.4 U1.50 | length 1041.1
  Top Layer w8: 450,2095 475,2070 475,1845 505,1815 505,1300 566.1,1238.9 U1.50
EXT3: J5.5 U1.48 | length 904
  Top Layer w8: J5.5 529.53,1754.53 520,1745 520,1315 557,1278 U1.48@702.76,1278
EXT4: J5.6 U1.47 | length 1007.8
  Top Layer w8: J5.6 580,2066.46 580,1775 535,1730 535,1330 567,1298 U1.47
EXT5: J5.7 U1.46 | length 866.3
  Top Layer w8: J5.7 629.53,1794.53 550,1715 550,1350 582.3,1317.7 U1.46
EXT6: J5.8 U1.45 | length 967
  Top Layer w8: J5.8 680,2066.46 680,1815 565,1700 565,1370 597.6,1337.4 U1.45
EXT7: J5.9 U1.44 | length 828.5
  Top Layer w8: U1.44 607.9,1357.1 580,1385 580,1685 729.53,1834.53 J5.9
EXT8: J5.10 U1.43 | length 929.2
  Top Layer w8: U1.43 623.2,1376.8 595,1405 595,1665 780,1850 780,2066.46 J5.10
EXT9: J5.11 U1.41 | length 770.8
  Top Layer w8: U1.41 633.8,1416.2 610,1440 610,1650 829.53,1869.53 J5.11
EXT10: J5.12 U1.40 | length 871.5
  Top Layer w8: U1.40 649.1,1435.9 625,1460 625,1635 880,1890 880,2066.46 J5.12
EXT11: J5.13 U1.35 | length 480.3
  Top Layer w8: U1.35 812.76,1712.76 929.53,1829.53 J5.13
EXT12: J5.14 U1.34 | length 613.9
  Top Layer w8: U1.34 832.46,1702.46 980,1850 980,2066.46 J5.14
EXT13: J5.15 U1.33 | length 505.4
  Top Layer w8: U1.33 852.16,1692.16 1029.53,1869.53 J5.15
EXT14: J5.16 U1.32 | length 639.1
  Top Layer w8: U1.32 871.86,1676.86 1080,1885 1080,2066.46 J5.16
EXT15: J5.17 U1.30 | length 522.3
  Top Layer w8: U1.30 911.26,1681.26 1129.53,1899.53 J5.17
EXT16: J5.18 U1.29 | length 656
  Top Layer w8: U1.29 930.96,1670.96 1180,1920 1180,2066.46 J5.18
EXT17: J5.19 U1.27 | length 539.3
  Top Layer w8: U1.27 970.36,1680.36 1229.53,1939.53 J5.19
EXT18: J5.20 U1.26 | length 672.9
  Top Layer w8: U1.26 990.06,1670.06 1280,1960 1280,2066.46 J5.20
EXT19: J5.21 U1.24 | length 562.1
  Top Layer w8: U1.24 1029.46,1679.46 1190,1840 1200,1840 1329.53,1969.53 J5.21
EXT20: J5.22 U1.23 | length 707.4
  Top Layer w8: U1.23 1049.16,1669.16 1200,1820 1230,1820 1380,1970 1380,2066.46 J5.22
EXT21: J5.23 U1.22 | length 610.6
  Top Layer w8: U1.22 1068.86,1658.86 1210,1800 1235,1800 1340,1905 1365,1905 1429.53,1969.53 J5.23
EXT22: J5.24 U1.21 | length 758.9
  Top Layer w8: U1.21 1088.56,1648.56 1225,1785 1245,1785 1350,1890 1405,1890 1480,1965 1480,2066.46 J5.24
EXT23: J5.25 U1.17 | length 637
  Top Layer w8: U1.17 1167.36,1697.36 1240,1770 1255,1770 1360,1875 1439.06,1875 1529.53,1965.47 J5.25
EXT24: J5.26 U1.16 | length 773.5
  Top Layer w8: U1.16 1187.06,1675.85 1371.21,1860 1470,1860 1580,1970 1580,2066.46 J5.26
EXT25: J5.27 U1.15 | length 678.3
  Top Layer w8: U1.15 1206.76,1669.33 1382.43,1845 1504.06,1845 1629.53,1970.47 J5.27
EXT26: J5.28 U1.14 | length 826.4
  Top Layer w8: U1.14 1226.46,1662.82 1393.64,1830 1540,1830 1680,1970 1680,2066.46 J5.28
EXT27: J5.29 U1.12 | length 723.1
  Top Layer w8: U1.12 1265.86,1676.01 1404.85,1815 1574.06,1815 1729.53,1970.47 J5.29
EXT28: J5.30 U1.11 | length 874.2
  Top Layer w8: U1.11 1285.56,1669.49 1416.07,1800 1615,1800 1780,1965 1780,2066.46 J5.30
EXT29: J5.31 U1.8 | length 728.9
  Top Layer w8: U1.8 1344.66,1644.66 1420,1720 1584.06,1720 1829.53,1965.47 J5.31
EXT30: J5.32 U1.7 | length 877.7
  Top Layer w8: U1.7 1364.36,1639.36 1430,1705 1620,1705 1880,1965 1880,2066.46 J5.32
EXT31: J5.33 U1.6 | length 783.3
  Top Layer w8: U1.6 1384.06,1634.06 1440,1690 1654.06,1690 1929.53,1965.47 J5.33
EXT32: J5.34 U1.5 | length 929.2
  Top Layer w8: U1.5 1403.76,1628.76 1450,1675 1685,1675 1980,1970 1980,2066.46 J5.34
EXT33: J5.35 U1.2 | length 800.8
  Top Layer w8: U1.2 1462.86,1627.86 1495,1660 1724.06,1660 2029.53,1965.47 J5.35
EXT34: J5.36 U1.1 | length 946.8
  Top Layer w8: U1.1 1482.56,1617.56 1510,1645 1760,1645 2080,1965 2080,2066.46 J5.36
EXT35: J5.37 R3.1 R4.1 | length 494.1
  Bottom Layer w8: R3.1 R4.1 1800,1919 1821,1940 2052.6,1940 J5.37
EXT36: J5.38
FLASH_CS: U1.38 U2.1 U8.1 | length 1585.9
  Top Layer w8: v1@385.83,1190.83 U8.1 ; v3(665,1555) 645,1535 645,1485 655,1475 U1.38@702.76,1475
  Bottom Layer w8: U2.1 465,650 510,695 510,845 535,870 535,1050 550,1065 550,1200 ; v1(385,1200) 550,1200 ; v3(665,1555) 625,1515 625,1275 550,1200
FLASH_HOLD: R33.2 U1.61 U2.7 | length 543.1
  Top Layer w8: v2(560,1025) 562.8,1022.2 U1.61
  Bottom Layer w8: v2(560,1025) 560,858 540,838 540,733.09 573.09,700 U2.7
  other v2: 540,734
FLASH_MISO: U1.65 U2.2 U8.11 | length 1520.6
  Top Layer w8: U8.11 434.57,1614.57 465,1584.13 465,1270 575,1160 590,1160 620,1130 620,1090 610,1080 540,1080 v1(520,1100) ; v2(510,930) 635,930 648.4,943.4 U1.65
  Bottom Layer w8: U2.2 470,700 490,720 490,850 510,870 v2(510,930) 510,1055 520,1065 v1(520,1100)
FLASH_MOSI: U1.64 U2.5 U8.2 | length 1048.7
  Top Layer w8: v1(375,965) 505,965 v2(625,965) 626.9,963.1 U1.64 ; v1(375,1100) 320,1155 320,1370 334.25,1384.25 U8.2
  Bottom Layer w8: v1(375,965) v1(375,1100) ; U2.5 660,800 660,940 635,965 v2(625,965)
FLASH_SCK: U1.70 U2.6 U8.3 | length 972.8
  Top Layer w8: U8.3 435.16,1409.84 450,1395 450,1250 v1(585,1115) ; v2(600,845) 702.96,845 U1.70
  Bottom Layer w8: v1(585,1115) 585,913.7 585.65,914.35 600,900 v2(600,845) 580,845 555,820 555,766 571,750 U2.6
FLASH_WP: R34.2 U1.62 U2.3 | length 674.6
  Top Layer w8: v2(475,990) 595,990 607.5,1002.5 U1.62
  Bottom Layer w8: R34.2 U2.3 450,750 475,775 v2(475,990)
G: C7.1 J8.2 R22.2 R23.2 R24.2 R29.2 | length 843.9
  Top Layer w8: R22.2@829,400 R22.2 R23.2 ; C7.1@900,321 v4(900,315) R23.2 ; R24.2 R23.2 ; v2(1250,316) 1300.39,265.61 J8.2
  Bottom Layer w8: R29.2@900,321 v4(900,315) 935.5,350.5 1215.5,350.5 v2(1250,316)
G0: R22.1 U1.82 | length 295.7
  Top Layer w8: R22.1 970.36,625.36 U1.82
G1: R23.1 U1.83 | length 272.8
  Top Layer w8: R23.1 900,525 990.06,615.06 U1.83
G2: R24.1 U1.84 | length 249.9
  Top Layer w8: R24.1 975,575 1009.76,609.76 U1.84
GND: C1.2 C2.1 C3.1 C4.1 C9.2 C10.2 C11.2 C12.2 C14.2 C15.2 C18.2 C19.2 C20.2 C21.2 C22.2 C23.2 C24.2 C25.2 C26.2 C27.2 C28.2 C29.2 C30.2 C31.2 C32.2 C33.2 C34.2 C35.2 C36.2 C37.2 D1.1 D2.2 J1.5 J2.6 J4.1 J5.39 J5.40 J6.3 J6.M1 J6.M2 J6.M3 J7.4 J7.5 J7.6 J8.6 J8.7 J8.8 J8.10 J9.2 Q1.3 R3.2 R28.1 R29.1 R30.1 U1.3 U1.13 U1.25 U1.49 U1.54 U1.60 U1.68 U1.73 U1.77 U1.91 U1.96 U1.108 U1.113 U1.130 U1.136 U1.144 U2.4 U3.8 U3.12 U3.34 U3.37 U4.2 U4.12 U4.13 U5.2 U6.1 U7.1 U8.7 U8.18 U8.21 U8.25 U8.26 Y1.2 | length 2820.4
  Top Layer w8: v1(627.56,1175) 642.46,1160.1 U1.54 ; U1.68 762.86,884.3 v1(782.56,904) ; U1.60 780.66,1041.9 v1(782.56,1040) ; U1.49 765.16,1258.6 v1(782.56,1276) ; v1(781.56,795) 793.06,783.5 U1.73 ; U1.77 871.86,779.3 887.56,795 v1(971.56,795) ; v1(1008.56,1500) 1009.76,1501.2 U1.25 ; v2(1025,245) 1090.94,179.06 J8.10 ; U1.91 1147.66,775.1 1167.56,795 1227.56,795 1246.16,776.4 U1.96 ; v1(1243.56,1500) 1246.16,1502.6 U1.13 ; 1270.47,50.94 1449.06,50.94 1450,51.89 J8.6 ; 1270.47,51.42 J8.8 ; 1360.24,51.18 J8.7 ; U1.3 1443.16,1520.4 v1(1463.56,1500) 1468.56,1495 U1.144 ; J8.6@1450.59,120 v1(1465,120) ; v1(1492.56,1236) 1509.36,1219.2 U1.130 ; v1(1492.56,1355) 1510.16,1337.4 U1.136 ; v3@1510,718.44 1510,865 1529.3,884.3 U1.113
  Top Layer w10: U1.108 1507.06,715.5 v3(1507.56,715)
  Top Layer w12: C15.2 U6.1@86,474 ; U8.26 U8.25 165.43,1435.43 200,1470 v1@200,1537.8 ; U8.21 v1@200,1537.8 ; U8.18 170.43,1614.57 200,1585 v1@200,1537.8 ; v1(315,1510) 317.2,1512.2 U8.7 ; J1.5 v1@468.5,223.5
  other v1: 470,225 1197.56,795 937.56,1090 1909,1160 937.56,1185 200,1540 310,1800
  other v2: 2355,600
  other v3: 265,301 85,475
L-OUT: C39.2 J4.3 | length 161.5
  Top Layer w8: J4.3@2212.2,492.8 J4.3 2260.22,416 C39.2
LEFT: R18.1 U1.10 | length 2212.8
  Top Layer w8: U1.10 1305.26,1659.74 1425.52,1780 1530,1780 v2(1560,1750) ; v2(1710,525) 1900,525 1975,600 R18.1@2130,600
  Bottom Layer w8: v2(1560,1750) 1810,1500 1810,855 1710,755 v2(1710,525)
NetC1_1: C1.1 U4.3 Y1.1 | length 410.4
  Bottom Layer w8: U4.3 1340,291 1399,350 Y1.1 C1.1
NetC2_2: C2.2 C5.2 D1.2 R5.1 | length 229
  Bottom Layer w8: D1.2 R5.1 ; C5.2 R5.1 ; C2.2@2029,1745 R5.1
NetC3_2: C3.2 C39.1 R18.2 | length 199.4
  Top Layer w8: R18.2 C3.2 2271,554 C39.1
NetC4_2: C4.2 C38.1 R17.2 | length 156
  Bottom Layer w12: C4.2 R17.2 C38.1
NetC5_1: C5.1 R4.2 | length 71
  Bottom Layer w8: R4.2 C5.1
NetC6_2: C6.2 U4.8 | length 113.6
  Top Layer w8: v1@1090,279 C6.2
  Bottom Layer w8: U4.8 v1(1090,275)
NetC7_2: C7.2 U4.7 | length 265.2
  Bottom Layer w8: v1(956,315) 1125,315 1140,300 U4.7
NetC8_2: C8.2 U4.6 | length 506.1
  Top Layer w8: C8.2 871,250 v3(950,250)
  Bottom Layer w8: v3(950,250) 955,250 1047,158 1173,158 1190,175 U4.6
NetC13_1: C13.1 U4.10 | length 846.7
  Top Layer w10: v2(1305,510) 1495,510 1545,460 v2(1750,460)
  Bottom Layer w10: U4.10 1140,534 1164,510 v2(1305,510) ; v2(1750,460) C13.1
NetC13_2: C13.2 R31.1 | length 102.4
  Bottom Layer w12: C13.2 1930,630 R31.1
NetC37_1: C37.1 U8.17 | length 85.9
  Top Layer w12: U8.17 199.84,1640.16 v1(200,1640)
NetD2_1: D2.1 R11.2 | length 66
  Top Layer w10: R11.2 D2.1
NetJ6_1: J6.1 J7.2 R1.1 | length 1076.6
  Top Layer w8: J7.2 2227.66,1488.66 J6.1
  Bottom Layer w8: R1.1 2310,860 2355,905 2355,1325 2375,1345 2375,1516 J6.1
NetJ6_5: J6.5 J7.3 R2.1 | length 952.3
  Top Layer w8: J7.3 2217,1647 J6.5
  Bottom Layer w8: J7.3 2200,1504.8 2200,1465 2178.4,1443.4 2178.4,1348.4 2140,1310 2140,900 2180,860 R2.1
NetJ8_9: J8.9 R35.2 | length 960.6
  Top Layer w10: R35.2 525,325 600,250 800,250 875,175 875,80 905,50 1170,50 1180.71,60.71 J8.9
NetQ1_2: Q1.2 R5.2 | length 76
  Bottom Layer w8: Q1.2 R5.2@1869,1743
NetR7_1: R7.1 U1.39 | length 95.5
  Top Layer w8: U1.39 778.16,1455.6 v1(792.56,1470)
NetR9_1: R9.1 U1.71 | length 251.4
  Top Layer w8: U1.71 650.2,825.2 640,815 640,725 650,715 v3(730,715)
PROG_B: R8.1 U1.37 U8.9 | length 590.8
  Top Layer w12: v1(315,1565) 316.61,1563.39 U8.9
  Bottom Layer w8: v1@316,1566 576,1566 610,1600 697,1600 720,1577 R8.1@720,1515
  Bottom Layer w12: v1(315,1565) v1@316,1566 ; R8.1 R8.1@720,1515
  other v1: 700,1515
PS2_CLK: R2.2 U1.99 | length 1013.6
  Top Layer w8: U1.99 1305.26,659.74 1375,590 1540,590 1615,665 1935,665 1991,721 v2(2180,721)
PS2_DATA: R1.2 U1.98 | length 1168.7
  Top Layer w8: U1.98 1285.56,650.56 1366.12,570 1550,570 1625,645 1945,645 1980,680 2309,680 v2(2310,681)
R: C8.1 J8.1 R25.2 R26.2 R27.2 R30.2 | length 1054.7
  Top Layer w8: R25.2 R26.2 v4(750,396) C8.1 ; v2(1250,375) 1390.16,234.84 J8.1
  Bottom Layer w8: R30.2 R30.2@750,394 ; v4(750,396) R30.2@750,394 ; v2(1250,375) 769,375 R30.2@750,394
R0: R25.1 U1.79 | length 446.4
  Top Layer w8: R25.1 705,585 845,585 911.26,651.26 U1.79
R1: R26.1 U1.80 | length 397.2
  Top Layer w8: R26.1 760,565 855,565 930.96,640.96 U1.80
R2: R27.1 U1.81 | length 347.9
  Top Layer w8: R27.1 815,545 865,545 950.66,630.66 U1.81
R-OUT: C38.2 J4.2 | length 91.9
  Bottom Layer w12: J4.2@1970.08,149.06 C38.2@1970.08,240.92
RIGHT: R17.1 U1.9 | length 1939.3
  Top Layer w8: U1.9 1324.96,1649.96 1425,1750 v2(1500,1750)
  Bottom Layer w8: v2(1500,1750) 1500,1745 1535,1710 1575.5,1710 1785,1500.5 1785,860 1685,760 1685,445 R17.1
SD_CS: J2.2 U1.59 | length 695.1
  Top Layer w8: v1(125,1185) 150,1185 273.4,1061.6 U1.59
  Bottom Layer w8: J2.2 124.96,1185.04 v1(125,1185)
SD_MISO: J2.7 R10.1 U1.78 | length 1187.8
  Top Layer w8: v1(125,966) R10.1 264,966 425,805 425,630 480,575 602.43,575 632.43,605 835,605 891.56,661.56 U1.78
  Bottom Layer w8: J2.7 122.5,968.5 v1(125,966)
SD_MOSI: J2.3 U1.74 | length 1161.8
  Top Layer w8: v1(125,1140) 150,1140 465,825 465,640 500,605 590,605 630,645 800.52,645 812.76,657.24 U1.74
  Bottom Layer w8: J2.3 v1@123.27,1141.73
SD_SCK: J2.5 U1.75 | length 1169
  Top Layer w8: v1(125,1055) 205,1055 445,815 445,635 490,590 596.21,590 631.21,625 820,625 832.46,637.46 U1.75
  Bottom Layer w8: J2.5 v1@124.88,1055.12
STDN: R32.1 U4.1 | length 70
  Bottom Layer w10: U4.1 R32.1
TCK: J9.3 U1.109 | length 1179.3
  Top Layer w8: U1.109 1639.5,805.5 1660,785 1950,785 1965,800 2340,800 2440,700 2500,700 2525,675 2525,575 2500,550 J9.3
TDI: J9.5 U1.110 | length 921
  Top Layer w8: U1.110 1649.8,825.2 1670,805 1940,805 1955,820 2355,820 2425,750 J9.5@2450,750
TDO: J9.4 U1.106 | length 1198.5
  Top Layer w8: U1.106 1443.16,656.84 1470,630 1520,630 1615,725 1935,725 1990,780 2330,780 2450,660 J9.4@2450,650
TMS: J9.6 U1.107 | length 1200.2
  Top Layer w8: U1.107 1462.86,667.14 1480,650 1510,650 1615,755 v2(1900,755) ; v2(1900,840) 2375,840 2385,850 J9.6
  Bottom Layer w8: v2(1900,755) v2(1900,840)
VIDEO: J4.4 R31.2 | length 79.8
  Bottom Layer w12: J4.4 R31.2@1987.8,543.8
VSYNC: J8.14 U1.85 | length 676.4
  Top Layer w8: U1.85 1029.46,604.46 1020,595 1020,290 1085,225 1125,225 1150.79,199.21 J8.14
WR: U1.121 U3.15 | length 484.1
  Top Layer w8: U1.121 1684.46,1041.9 1692.56,1050 1900,1050 1910,1040 v2(1970,1040)
  Bottom Layer w8: v2@1970.24,1039.76 U3.15
XA0: U1.141 U3.41 | length 297.4
  Top Layer w8: U1.141 1684.26,1435.9 1695.16,1425 v2(1725,1425)
  Bottom Layer w8: U3.41 1686.22,1386.22 v2(1725,1425)
XA1: U1.139 U3.40 | length 274.2
  Top Layer w8: U1.139 1663.5,1396.5 1685,1375 v2(1715,1375)
  Bottom Layer w8: U3.40 1694.72,1354.72 v2(1715,1375)
XA2: U1.137 U3.39 | length 190.9
  Top Layer w8: U1.137 1642.9,1357.1 v2(1675,1325)
  Bottom Layer w8: U3.39 1602.36,1325 v2(1675,1325)
XA3: U1.134 U3.6 | length 487.3
  Top Layer w8: U1.134 1763,1298 1785,1320 v2(2000,1320)
  Bottom Layer w8: v2(2000,1320) 2003.23,1323.23 U3.6
XA4: U1.133 U3.7 | length 480
  Top Layer w8: U1.133 1768.3,1278.3 1780,1290 v2(1970,1290)
  Bottom Layer w8: v2@1971.73,1291.73 U3.7
XA5: U1.120 U3.16 | length 489.1
  Top Layer w8: U1.120 1694.76,1022.2 1702.56,1030 1890,1030 1910,1010 v2(2000,1010)
  Bottom Layer w8: v2(2000,1010) 2001.73,1008.27 U3.16
XA6: U1.118 U3.17 | length 480.8
  Top Layer w8: U1.118 1712.2,982.8 1720,975 v2(1970,975)
  Bottom Layer w8: v2(1970,975) 1971.77,976.77 U3.17
XA7: U1.116 U3.27 | length 218.7
  Top Layer w8: U1.116 1676.6,943.4 v2(1690,930)
  Bottom Layer w8: U3.27 1674.72,945.28 v2(1690,930)
XA8: U1.114 U3.18 | length 526.3
  Top Layer w8: U1.114 1646,904 1685,865 1800,865 1877,942 v2@1998.69,942
  Bottom Layer w8: v2@1998.69,942 2001.96,945.28 U3.18
  other v2: 2000,942
XA9: U1.112 U3.19 | length 514
  Top Layer w8: U1.112 1660.4,864.6 1680,845 1815,845 1885,915 v2(1970,915)
  Bottom Layer w8: v2@1970,913.78 U3.19
XA10: U1.104 U3.26 | length 324.8
  Top Layer w8: U1.104 1403.76,763.76 1415,775 1415,795 1445,825 v2(1475,825)
  Bottom Layer w8: v2(1475,825) 1510,860 1510,870 1553.78,913.78 U3.26
XA11: U1.102 U3.28 | length 433.5
  Top Layer w8: U1.102 1364.36,770.64 1355,780 1355,820 1404.5,869.5 v2(1474.5,869.5)
  Bottom Layer w8: v2(1474.5,869.5) 1545,940 1545,965 1556.77,976.77 U3.28
XA12: U1.101 U3.29 | length 466.7
  Top Layer w8: U1.101 1344.66,765.34 1335,775 1335,830 1415,910 v2(1475,910)
  Bottom Layer w8: v2(1475,910) 1525,960 1525,975 1558.27,1008.27 U3.29
XA13: U1.100 U3.30 | length 502.1
  Top Layer w8: U1.100 1324.96,760.04 1315,770 1315,840 1425,950 v2(1475,950)
  Bottom Layer w8: v2(1475,950) 1540,1015 1540,1023.77 1555.99,1039.76 U3.30
XA14: U1.111 U3.20 | length 510.2
  Top Layer w8: U1.111 1655.1,844.9 1675,825 1825,825 1881,881 1998.3,881 v2@1997.3,880
  Bottom Layer w8: v2@1998.3,881 1999.58,882.28 U3.20
  other v2: 2000,881
XA15: U1.131 U3.38 | length 320.2
  Top Layer w8: U1.131 1661.1,1238.9 1675,1225 v2(1730,1225)
  Bottom Layer w8: U3.38 1663.27,1291.73 v2(1730,1225)
XA16: U1.138 U3.5 | length 489.7
  Top Layer w8: U1.138 1653.2,1376.8 1680,1350 1750,1350 1755,1355 v2(1970,1355)
  Bottom Layer w8: v2@1970.28,1354.72 U3.5
XA17: U1.140 U3.4 | length 488.6
  Top Layer w8: U1.140 1673.8,1416.2 1690,1400 1740,1400 1755,1385 v2(2000,1385)
  Bottom Layer w8: v2@2001.22,1386.22 U3.4
XA18: U1.142 U3.3 | length 491
  Top Layer w8: U1.142 1744.4,1455.6 1785,1415 v2(1970,1415)
  Bottom Layer w8: v2@1972.72,1417.72 U3.3
XA19: U1.105 U3.25 | length 280.2
  Top Layer w8: U1.105 1423.46,758.46 1450,785 v5(1475,785)
  Bottom Layer w8: v5(1475,785) 1525,835 1525,850 1557.28,882.28 U3.25
XA20: U1.143 U3.42 | length 239.4
  Top Layer w8: U1.143 1640.3,1475.3 1651,1486 v2(1675,1486)
  Bottom Layer w8: U3.42 1657.72,1417.72 1675,1435 v2(1675,1486)
XD0: U1.132 U3.9 | length 487.4
  Top Layer w8: U1.132 1676.4,1258.6 1685,1250 1760,1250 1780,1230 v2(1970,1230)
  Bottom Layer w8: v2@1971.26,1228.74 U3.9
XD1: U1.127 U3.10 | length 489.1
  Top Layer w8: U1.127 1675.1,1160.1 1710,1195 v2(2000,1195)
  Bottom Layer w8: v2@2002.24,1197.24 U3.10
XD2: U1.124 U3.13 | length 478.4
  Top Layer w8: U1.124 1693.56,1101 1694.56,1100 v2(1970,1100)
  Bottom Layer w8: v2(1970,1100) 1972.76,1102.76 U3.13
XD3: U1.123 U3.14 | length 480.3
  Top Layer w8: U1.123 1698.86,1081.3 1710.16,1070 v2(2000,1070)
  Bottom Layer w8: v2@2001.26,1071.26 U3.14
XD4: U1.115 U3.31 | length 412
  Top Layer w8: U1.115 1651.3,923.7 1675,900 v2(1720,900)
  Bottom Layer w8: U3.31 1658.74,1071.26 1680,1050 1680,985 1720,945 v2(1720,900)
XD5: U1.117 U3.32 | length 434.8
  Top Layer w8: U1.117 1701.9,963.1 1720,945 v2(1750,945)
  Bottom Layer w8: U3.32 1652.24,1102.76 1695,1060 1695,1000 v2(1750,945)
XD6: U1.119 U3.35 | length 436.3
  Top Layer w8: U1.119 v2(1730,1002.5)
  Bottom Layer w8: U3.35 1652.76,1197.24 1685,1165 1685,1100 1715,1070 1715,1017.5 v2(1730,1002.5)
XD7: U1.126 U3.36 | length 303.4
  Top Layer w8: U1.126 1700.4,1140.4 v2(1720,1160)
  Bottom Layer w8: U3.36 1651.26,1228.74 v2(1720,1160)
pads on no net: J1.4 J1.11 J1.M J2.1 J2.8 J2.9 J2.10 J2.P1 J2.P2 J2.P3 J2.P4 J4.6 J4.7 J6.2 J6.6 J8.4 J8.5 J8.11 J8.12 J8.15 J8.16 J8.17 J8.Hole49 J8.Hole50 M1. M2. M3. M4. U1.56 U1.57 U1.58 U1.66 U1.67 U1.72 U1.95 U1.97 U3.1 U3.2 U3.21 U3.22 U3.23 U3.24 U3.43 U3.44 U4.9 U4.11 U5.1 U8.5 U8.6 U8.8 U8.10 U8.12 U8.13 U8.14 U8.19 U8.22 U8.23 U8.24 U8.27 U8.28

## Polygon pours and split planes (outlines as drawn)
GND on Bottom Layer "543" (hatched Horizontal grid 8 track 8, remove dead copper, pour order 0): 2550.91,1.28 3.31,1.28 3.31,2190.65 2550.91,2190.65

## Keep-outs
Keep-Out Layer:
  lines w10: 2435,2204.53 125,2204.53 ccw(c124.77,2079.77) 0,2080 0,125 ccw(c125,125) 125,0 2435,0 ccw(c2434.53,124.53) 2559.06,125 2559.06,2080 ccw(c2434.53,2080.47) 2435,2205

## Silkscreen, mask and mechanical layers (free items; w line width, h text height)
Top Overlay:
  drawing of 11 lines, arcs and shapes, not listed
  text "antoniovillena" at 455,1715 h30
  text "mcleod_ideafix" at 455,1670 h30
  text "superfo" at 455,1625 h30
  text "Hark0" at 455,1575 h30
Bottom Overlay:
  circle w10: c1225,970 r14.14

## Text inside footprints (layer, text, board x,y; h text height)
J6: Top Overlay "2" at 2356.88,1489.88 h37.5 r270; Top Overlay "1" at 2356.88,1589.88 h37.5 r270; Top Overlay "3" at 2356.88,1677.38 h37.5 r270; Top Overlay "5" at 2195,1610 h37.5 r270; Top Overlay "6" at 2195,1460 h37.5 r270; Top Overlay "4" at 2356.88,1402.38 h37.5 r270; Mechanical 1 "2" at 2356.88,1489.88 h37.5 r270; Mechanical 1 "1" at 2356.88,1589.88 h37.5 r270; Mechanical 1 "3" at 2356.88,1677.38 h37.5 r270; Mechanical 1 "5" at 2195,1610 h37.5 r270; Mechanical 1 "6" at 2195,1460 h37.5 r270; Mechanical 1 "4" at 2356.88,1402.38 h37.5 r270
U1: Top Overlay "73" at 700,650 h37.5; Top Overlay "1" at 1501.74,1693.42 h37.5 r180; Top Overlay "37" at 592.56,1495 h37.5 r270; Top Overlay "109" at 1670.99,821.13 h37.5 r90; Mechanical 2 "QUAD.50M/144/WG22.60" at 878.74,937.38 h22.5 r180